# EAGLE board EBook READER v17 (EAGLE 9.7.0)
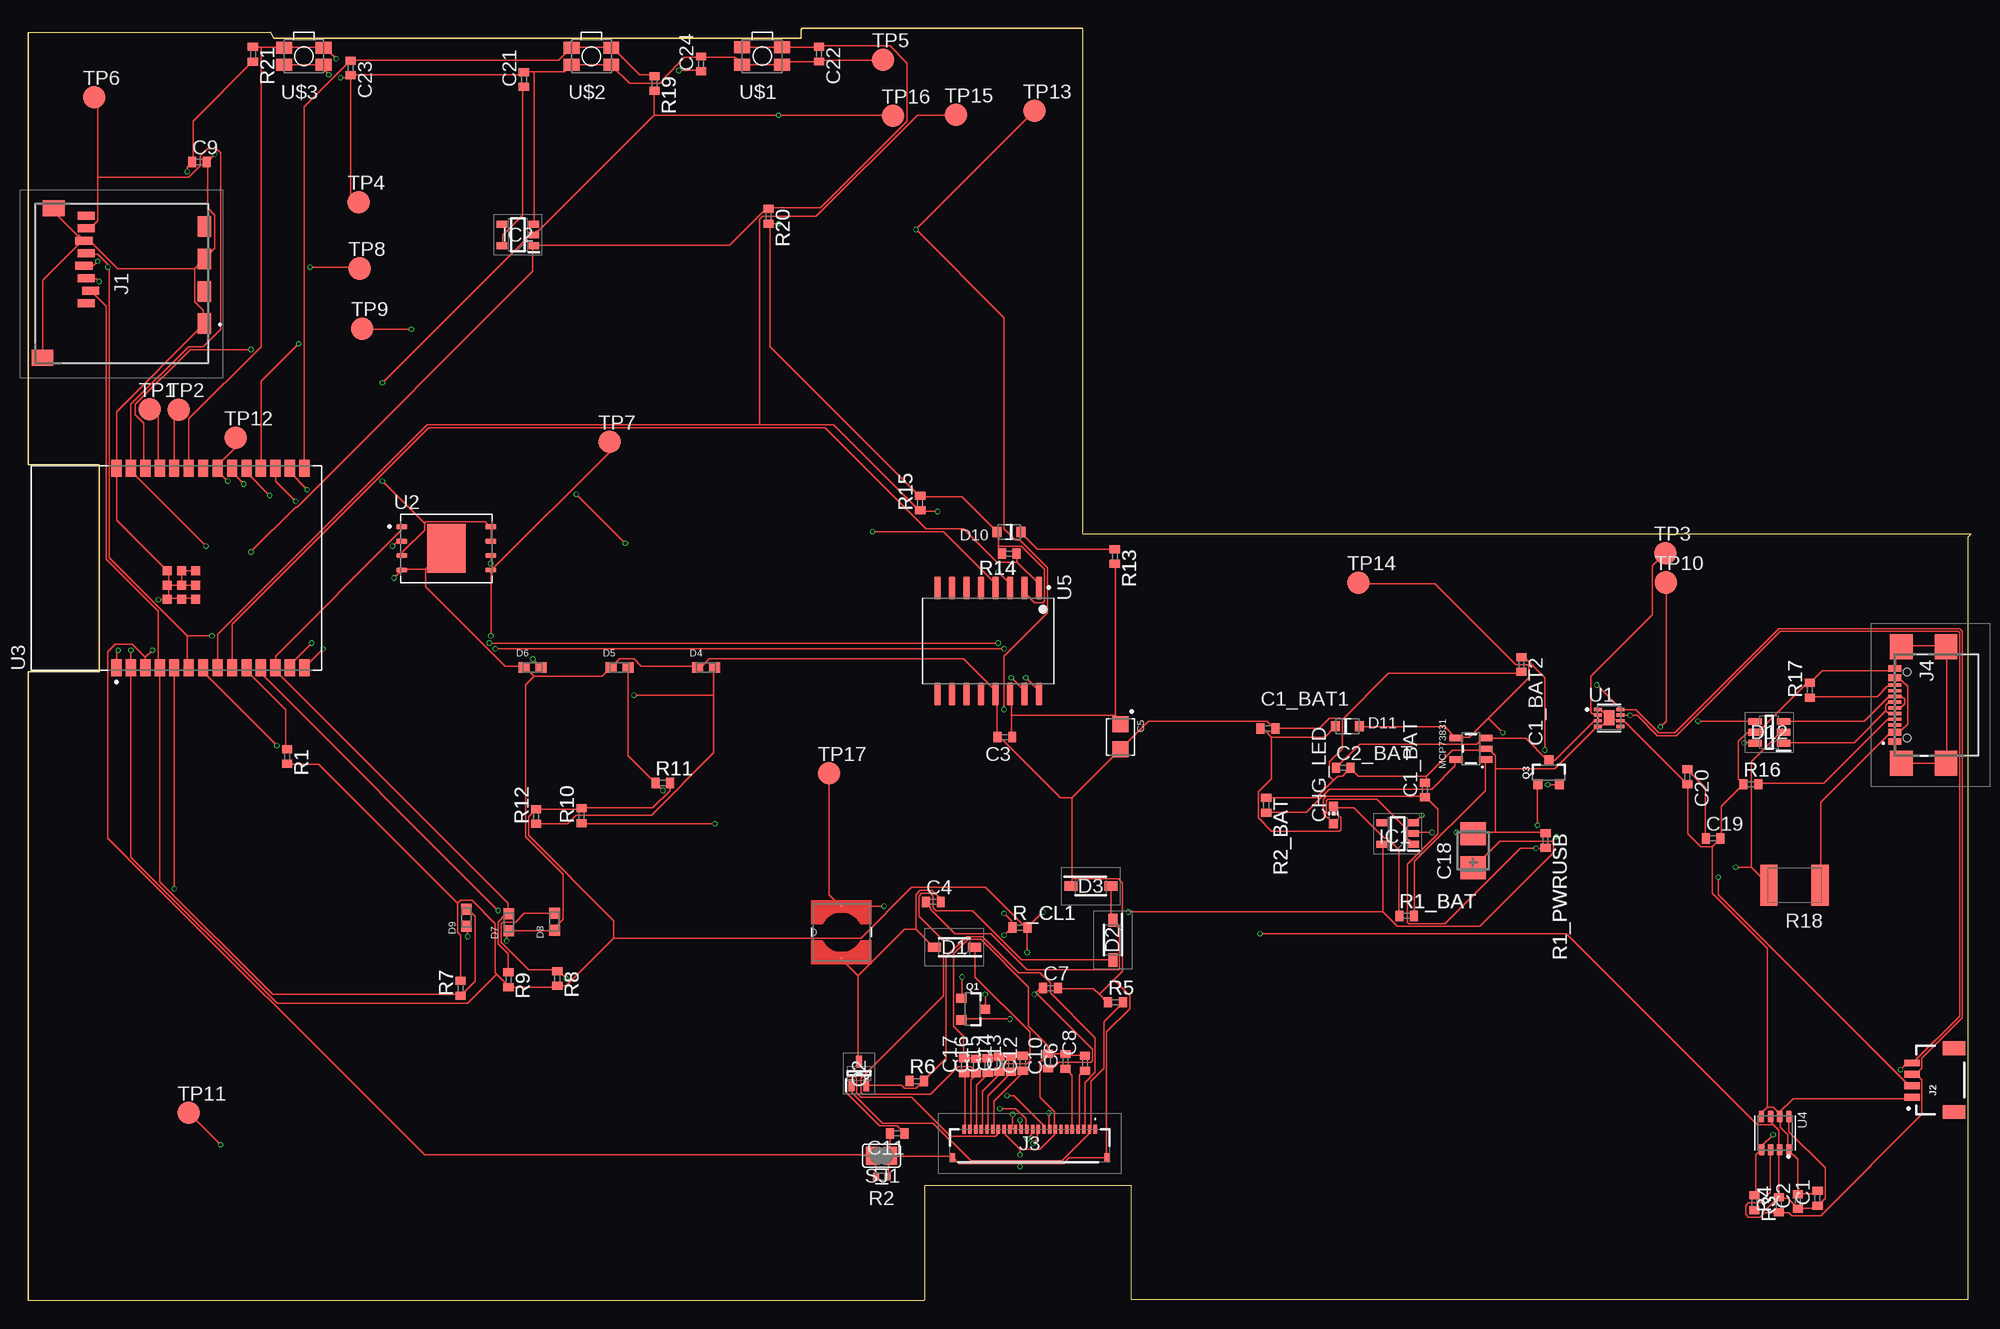
[diagram p0: board, top side]
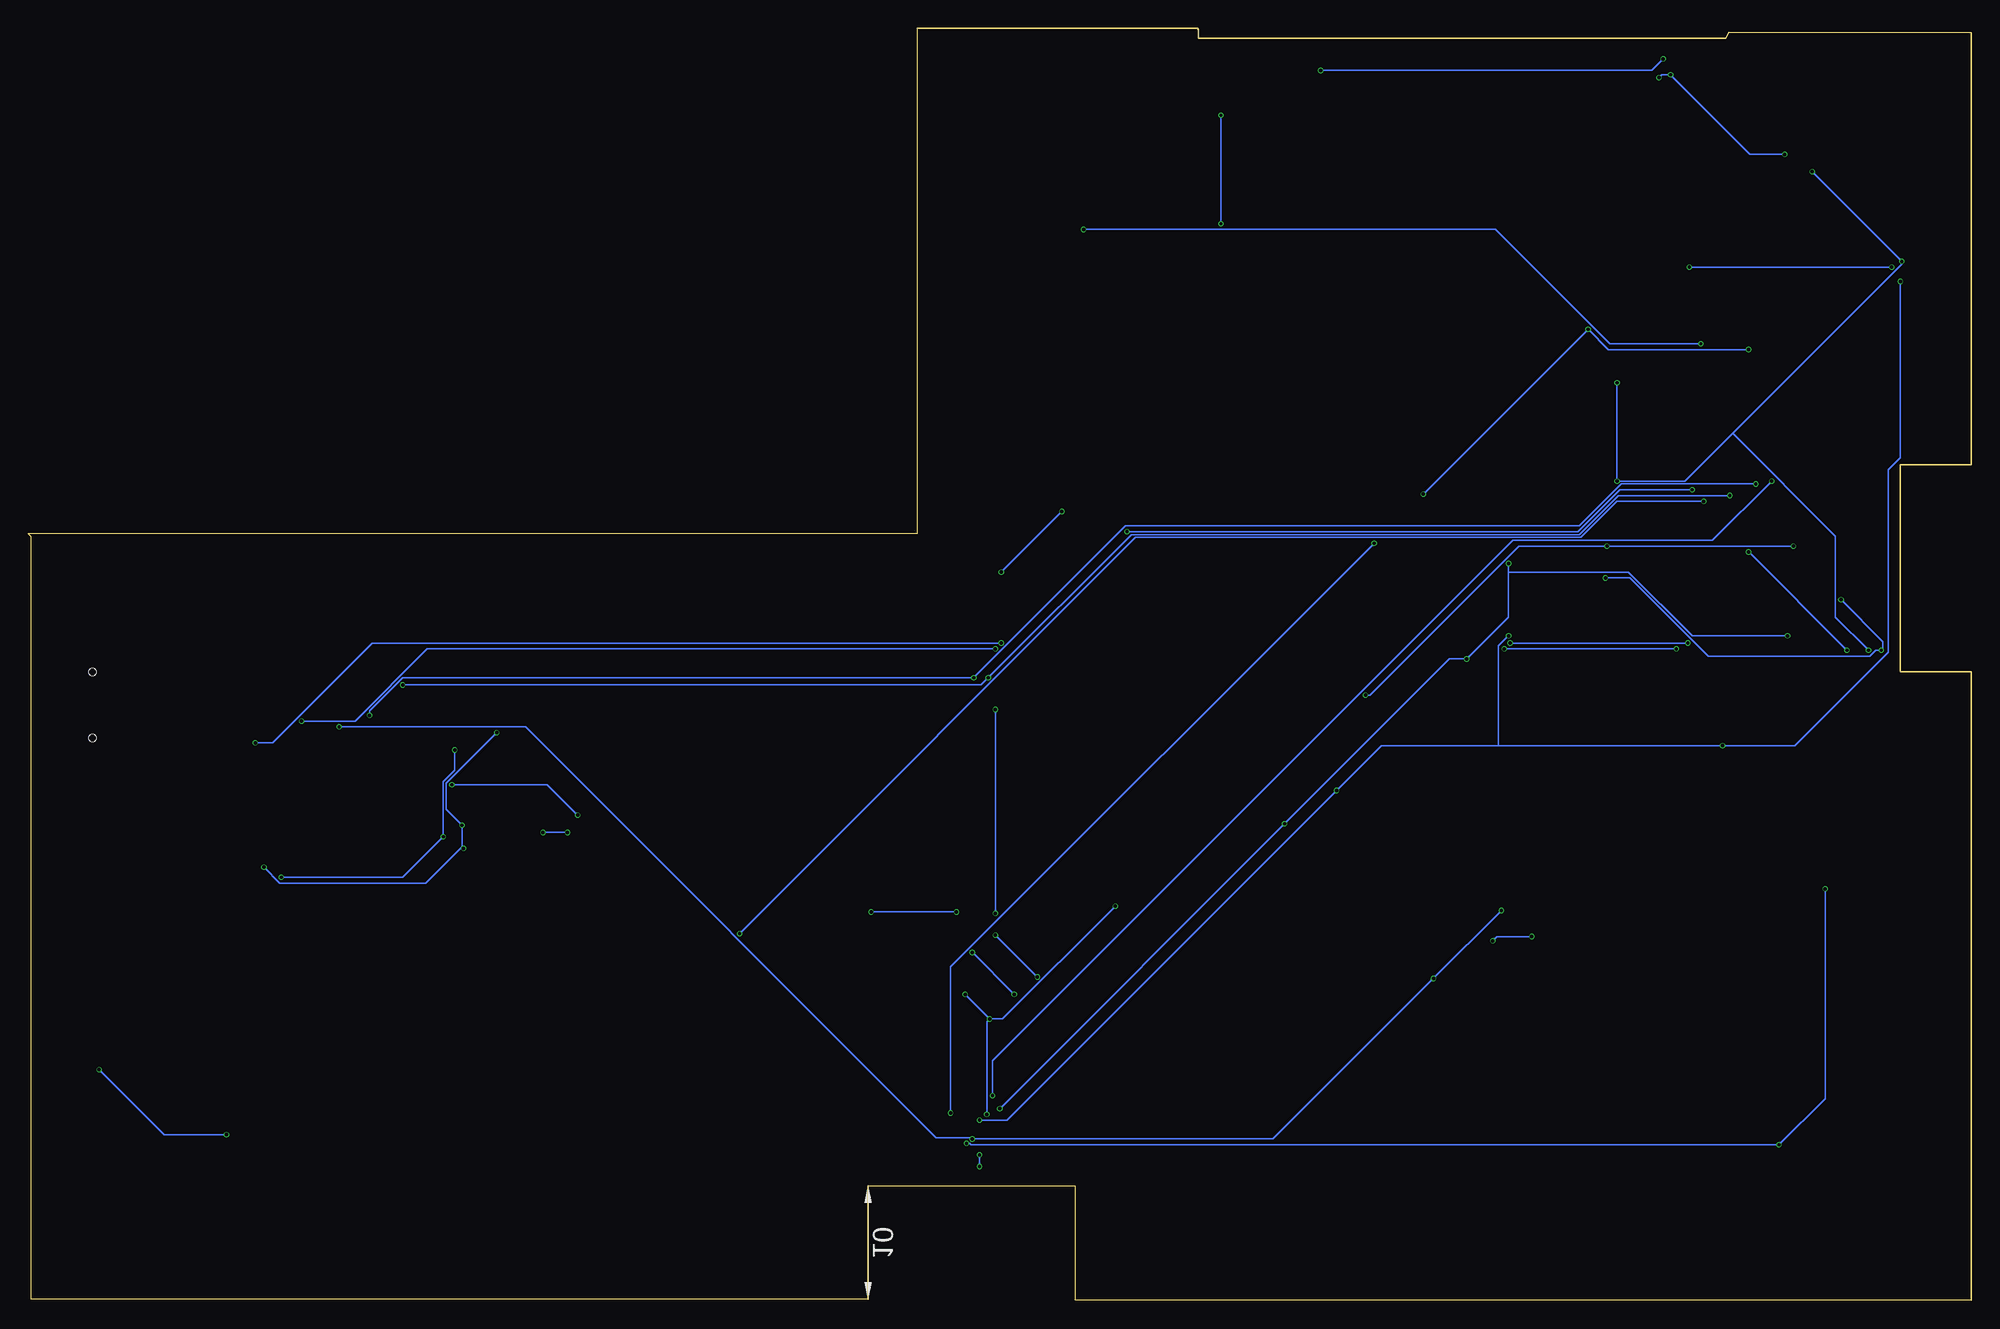
[diagram p1: board, bottom side, seen from below]

Size 170.67 x 111.69 mm. Coordinates in mm from the lower left corner, seen from the top.
Outline: 21.29,111.37 21.56,110.82 67.86,110.82 67.86,111.58 67.97,111.69 92.62,111.69 92.62,67.31 170.67,67.31 170.4,67.05 170.4,0.05 96.92,0.05 96.92,10.06 78.72,10.06 78.72,0.03 78.69,0 0,0 0,55.17 6.21,55.17 6.21,73.37 0,73.37 0,111.32 21.29,111.37
Copper layers (1*16): Top / Bottom
Stack-up Default Layer Stack: Top User Defined 0.035mm / Dielectric-1 User Defined 1.6mm / Bottom User Defined 0.035mm
Design rules: minimum copper width 5mil, minimum drill size 0.3mm, copper clearance wire_polygon to wire_polygon 5mil, copper clearance wire_polygon to pad_smd 5mil, copper clearance wire_polygon to via 5mil, copper clearance pad_smd to pad_smd 5mil, copper clearance pad_smd to via 5mil, copper clearance via to via 5mil, copper clearance smd to pad (same net) 5mil, copper clearance smd to via (same net) 5mil, copper clearance smd to smd (same net) 5mil, dimension clearance 0.2mm, via restrict clearance 0mil, restrict clearance 0mil, drill distance 6mil, keepout clearance 0mil

## Footprints (pad centres in the part's own frame; a part is rotated, then mirrored left to right if it is on the bottom)
ESP32_WROVER_EAGLE-LTSPICE_C0402 = smd 0.7 x 0.9: 1 -0.65,0; 2 0.65,0
EAGLE-LTSPICE_C0402 = smd 0.7 x 0.9: 1 -0.65,0; 2 0.65,0
CAPCP3225X100N = smd 1.4 x 1.4: 1 -1.1,0; 2 1.1,0
RCL_CT3528 = smd 2 x 2.2: + -1.5,0; - 1.5,0
ADAFRUIT_CHIP-LED0603 = smd 0.8 x 0.8: A 0,-0.75; C 0,0.75
SOD3716X135N = smd 1.15 x 0.8: 1 -1.75,0; 2 1.75,0
DIOC1608X36N = smd 0.97 x 0.94: 1 -0.75,0; 2 0.75,0
ESP32_WROVER_AVX---SD0805S020S1R0_AVX_SD0805S020S1R0_0 = smd 0.8 x 0.9: 1 -1.05,0; 2 1.05,0
SOT95P280X145-6N = smd 1.2 x 0.6: 1 -1.25,0.95; 2 -1.25,0; 3 -1.25,-0.95; 4 1.25,-0.95; 5 1.25,0; 6 1.25,0.95
SOT95P280X120-5N = smd 0.9 x 0.6: 1 -1.4,0.95; 2 -1.4,0; 3 -1.4,-0.95; 4 1.4,-0.95; 5 1.4,0.95
SOT95P280X125-5N = smd 0.9 x 0.6: 1 -1.4,0.95; 2 -1.4,0; 3 -1.4,-0.95; 4 1.4,-0.95; 5 1.4,0.95
112ATAARR03ATTEND = smd 1.8 x 1.2: G1 10.6,10.4; G2 4.9,10.4; S1 7.75,10.4; S2 2.05,10.4 | smd 1.4 x 1.9: G3 13.6,-3.85; G4 0.45,-2.85 | smd 0.7 x 1.5: P1 8.8,0; P2 7.7,0.4; P3 6.6,0; P4 5.5,-0.2; P5 4.4,0; P6 3.3,-0.2; P7 2.2,0; P8 1.1,0
JST04_1MM_RA = smd 0.6 x 1.35: 1 -1.5,0; 2 -0.5,0; 3 0.5,0; 4 1.5,0 | smd 1.2 x 2: NC1 2.8,-3.675; NC2 -2.8,-3.675
FH34SRJ24S05SH99 = smd 0.3 x 0.8: 1 5.75,1.45; 2 5.25,1.45; 3 4.75,1.45; 4 4.25,1.45; 5 3.75,1.45; 6 3.25,1.45; 7 2.75,1.45; 8 2.25,1.45; 9 1.75,1.45; 10 1.25,1.45; 11 0.75,1.45; 12 0.25,1.45; 13 -0.25,1.45; 14 -0.75,1.45; 15 -1.25,1.45; 16 -1.75,1.45; 17 -2.25,1.45; 18 -2.75,1.45; 19 -3.25,1.45; 20 -3.75,1.45; 21 -4.25,1.45; 22 -4.75,1.45; 23 -5.25,1.45; 24 -5.75,1.45 | smd 0.4 x 0.8: MP1 6.75,-1.05; MP2 -6.75,-1.05
SAMACSYS_PARTS_USB4110GFA = smd 0.3 x 1.15: A1 -3.35,3.678; A4 -2.55,3.678; A5 -1.25,3.678; A6 -0.25,3.678; A7 0.25,3.678; A8 1.25,3.678; A9 2.55,3.678; A12 3.35,3.678; B1 3.05,3.678; B4 2.25,3.678; B5 1.75,3.678; B6 0.75,3.678; B7 -0.75,3.678; B8 -1.75,3.678; B9 -2.25,3.678; B12 -3.05,3.678 | smd 2.18 x 2: MP1 -5.11,-0.827; MP2 5.11,-0.827; MP3 -5.11,3.103; MP4 5.11,3.103 | hole 0.65: -2.89,2.603; 2.89,2.603
IND_4828-WE-TPC_WRE = smd 0.127 x 0.127: 1 -2.286,0; 2 2.286,0
ESP32_WROVER_SPARKFUN-IC-POWER_SOT23-5 = smd 0.55 x 1.2: 1 -0.95,-1.3; 2 0,-1.3; 3 0.95,-1.3; 4 0.95,1.3; 5 -0.95,1.3
ESP32_WROVER_SPARKFUN-DISCRETESEMI_SOT23-3 = smd 0.8 x 0.9: 1 -0.95,-1; 2 0.95,-1; 3 0,1.1
SOT65P210X110-3N = smd 1.05 x 0.5: 1 -1.05,0.65; 2 -1.05,-0.65; 3 1.05,0
ESP32_WROVER_EAGLE-LTSPICE_R0402 = smd 0.7 x 0.9: 1 -0.65,0; 2 0.65,0
RESC1005X40 = smd 0.535 x 0.644: 1 -0.507,0; 2 0.507,0
ESP32C6_VARISTOR_CT/CN1812 = smd 1.5 x 3.6: 1 -2.25,0; 2 2.25,0
SJ = smd 1.168 x 1.6: 1 -0.762,0; 2 0.762,0
TP20R = smd 2 x 2: TP 0,0
SON50P200X200X80-9N = smd 0.76 x 0.27: 1 -0.985,0.75; 2 -0.985,0.25; 3 -0.985,-0.25; 4 -0.985,-0.75; 5 0.985,-0.75; 6 0.985,-0.25; 7 0.985,0.25; 8 0.985,0.75 | smd 0.9 x 1.3: 9 0,0
SON127P600X800X80-9N = smd 0.94 x 0.44: 1 -3.895,1.905; 2 -3.895,0.635; 3 -3.895,-0.635; 4 -3.895,-1.905; 5 3.895,-1.905; 6 3.895,-0.635; 7 3.895,0.635; 8 3.895,1.905 | smd 3.4 x 4.3: 9 0,0
XCVR_ESP32-C6-WROOM-1-N8 = smd 1.5 x 0.9: 1 -8.75,5.26; 2 -8.75,3.99; 3 -8.75,2.72; 4 -8.75,1.45; 5 -8.75,0.18; 6 -8.75,-1.09; 7 -8.75,-2.36; 8 -8.75,-3.63; 9 -8.75,-4.9; 10 -8.75,-6.17; 11 -8.75,-7.44; 12 -8.75,-8.71; 13 -8.75,-9.98; 14 -8.75,-11.25; 15 8.75,-11.25; 16 8.75,-9.98; 17 8.75,-8.71; 18 8.75,-7.44; 19 8.75,-6.17; 20 8.75,-4.9; 21 8.75,-3.63; 22 8.75,-2.36; 23 8.75,-1.09; 24 8.75,0.18; 25 8.75,1.45; 26 8.75,2.72; 27 8.75,3.99; 28 8.75,5.26 | smd 0.8 x 0.8: 29_1 -2.755,0.79; 29_2 -1.505,0.79; 29_3 -0.255,0.79; 29_4 -2.755,-0.46; 29_5 -1.505,-0.46; 29_6 -0.255,-0.46; 29_7 -2.755,-1.71; 29_8 -1.505,-1.71; 29_9 -0.255,-1.71
ESP32_WROVER_BME680_PSON80P300X300X100-8N = smd 1.016 x 0.5: 1 1.458,1.2; 2 1.458,0.4; 3 1.458,-0.4; 4 1.458,-1.2; 5 -1.458,-1.22; 6 -1.458,-0.4; 7 -1.458,0.4; 8 -1.458,1.2
SOIC127P1032X265-16N = smd 2.05 x 0.59: 1 -4.655,4.445; 2 -4.655,3.175; 3 -4.655,1.905; 4 -4.655,0.635; 5 -4.655,-0.635; 6 -4.655,-1.905; 7 -4.655,-3.175; 8 -4.655,-4.445; 9 4.655,-4.445; 10 4.655,-3.175; 11 4.655,-1.905; 12 4.655,-0.635; 13 4.655,0.635; 14 4.655,1.905; 15 4.655,3.175; 16 4.655,4.445
MYBUTTON = smd 1.4 x 1.05: 1 1.75,0.75; 2 -1.75,0.75; 3 -1.75,-0.75; 4 1.75,-0.75

## Placement (x,y rotation side)
C1  [ESP32_WROVER_EAGLE-LTSPICE_C0402]  157.18,8.95 90 top
C1_BAT  4.7uF  [ESP32_WROVER_EAGLE-LTSPICE_C0402]  122.69,44.8 90 top
C1_BAT1  4.7uF  [ESP32_WROVER_EAGLE-LTSPICE_C0402]  108.89,50.2 0 top
C1_BAT2  4.7uF  [ESP32_WROVER_EAGLE-LTSPICE_C0402]  131.16,55.82 270 top
C2  [ESP32_WROVER_EAGLE-LTSPICE_C0402]  155.45,8.66 90 top
C2_BAT  4.7uF  [ESP32_WROVER_EAGLE-LTSPICE_C0402]  115.51,46.76 0 top
C3  [EAGLE-LTSPICE_C0402]  85.78,49.45 180 top
C4  4.7uF/25V  [EAGLE-LTSPICE_C0402]  79.5,34.97 0 top
C5  CPH3225A  [CAPCP3225X100N]  95.94,49.46 270 top
C6  1uF/50V  [ESP32_WROVER_EAGLE-LTSPICE_C0402]  91.1,20.96 90 top
C7  10uF  [EAGLE-LTSPICE_C0402]  89.79,27.4 0 top
C8  1uF/50V  [ESP32_WROVER_EAGLE-LTSPICE_C0402]  92.81,20.81 90 top
C9  100nF  [EAGLE-LTSPICE_C0402]  15.02,99.96 0 top
C10  0.1uF/50V  [ESP32_WROVER_EAGLE-LTSPICE_C0402]  89.57,20.99 90 top
C11  1uF/50V  [ESP32_WROVER_EAGLE-LTSPICE_C0402]  76.33,14.64 180 top
C12  1uF/50V  [ESP32_WROVER_EAGLE-LTSPICE_C0402]  87.35,20.81 90 top
C13  1uF/50V  [ESP32_WROVER_EAGLE-LTSPICE_C0402]  86.32,20.7 90 top
C14  1uF/50V  [ESP32_WROVER_EAGLE-LTSPICE_C0402]  85.3,20.72 90 top
C15  1uF/50V  [ESP32_WROVER_EAGLE-LTSPICE_C0402]  84.27,20.61 90 top
C16  1uF/50V  [ESP32_WROVER_EAGLE-LTSPICE_C0402]  83.24,20.56 90 top
C17  1uF/50V  [ESP32_WROVER_EAGLE-LTSPICE_C0402]  82.22,20.58 90 top
C18  100uF  [RCL_CT3528]  126.92,39.46 90 top
C19  100nF  [ESP32_WROVER_EAGLE-LTSPICE_C0402]  148.01,40.55 0 top
C20  4.7uF  [ESP32_WROVER_EAGLE-LTSPICE_C0402]  145.75,45.96 270 top
C21  100nF  [ESP32_WROVER_EAGLE-LTSPICE_C0402]  43.53,107.2 90 top
C22  1uF  [ESP32_WROVER_EAGLE-LTSPICE_C0402]  69.45,109.44 270 top
C23  100nF  [ESP32_WROVER_EAGLE-LTSPICE_C0402]  28.3,108.22 270 top
C24  100nF  [ESP32_WROVER_EAGLE-LTSPICE_C0402]  59.08,108.58 90 top
CHG_LED  [ADAFRUIT_CHIP-LED0603]  114.66,42.6 0 top
D1  MBR0530  [SOD3716X135N]  81.35,30.99 180 top
D2  MBR0530  [SOD3716X135N]  95.27,31.62 270 top
D3  MBR0530  [SOD3716X135N]  93.34,36.36 0 top
D4  PGB1010603MR  [DIOC1608X36N]  59.54,55.57 0 top
D5  PGB1010603MR  [DIOC1608X36N]  51.92,55.57 0 top
D6  PGB1010603MR  [DIOC1608X36N]  44.3,55.57 0 top
D7  PGB1010603MR  [DIOC1608X36N]  42.2,33.17 90 top
D8  PGB1010603MR  [DIOC1608X36N]  46.22,33.22 90 top
D9  PGB1010603MR  [DIOC1608X36N]  38.48,33.6 90 top
D10  ESP32_WROVER_AVX---SD0805S020S1R0_AVX_SD0805S020S1R0_0_0AVX_SD0805S020S1R0_0_0  [ESP32_WROVER_AVX---SD0805S020S1R0_AVX_SD0805S020S1R0_0]  86.16,67.47 180 top
D11  ESP32_WROVER_AVX---SD0805S020S1R0_AVX_SD0805S020S1R0_0_0AVX_SD0805S020S1R0_0_0  [ESP32_WROVER_AVX---SD0805S020S1R0_AVX_SD0805S020S1R0_0]  115.88,50.41 0 top
D12  USBLC6-2SC6Y  [SOT95P280X145-6N]  152.94,49.87 180 top
IC1  XC6220A331MR-G  [SOT95P280X120-5N]  120.29,40.97 180 top
IC2  BD5229G-TR  [SOT95P280X125-5N]  42.99,93.55 180 top
J1  112A-TAAR-R03_ATTEND  [112ATAARR03ATTEND]  5.08,96.35 270 top
J2  QWIIC_RIGHT_ANGLE  [JST04_1MM_RA]  165.49,19.32 90 top
J3  FH34SRJ-24S-0.5SH_99_  [FH34SRJ24S05SH99]  87.97,13.55 0 top
J4  SAMACSYS_PARTS_USB4110-GF-A  [SAMACSYS_PARTS_USB4110GFA]  167.64,52.27 90 top
L1  68uH  [IND_4828-WE-TPC_WRE]  71.42,32.31 90 top
MCP73831  ESP32_WROVER_SPARKFUN-IC-POWER_MCP73831  [ESP32_WROVER_SPARKFUN-IC-POWER_SOT23-5]  126.73,48.42 90 top
Q1  20V/4.2A/52mΩ/1.4W  [ESP32_WROVER_SPARKFUN-DISCRETESEMI_SOT23-3]  82.94,25.55 270 top
Q2  SI1308EDL-T1-GE3  [SOT65P210X110-3N]  72.97,19.9 90 top
Q3  20V/4.2A/52mΩ/1.4W  [ESP32_WROVER_SPARKFUN-DISCRETESEMI_SOT23-3]  133.56,46.32 0 top
R1  [ESP32_WROVER_EAGLE-LTSPICE_R0402]  22.72,47.74 270 top
R1_BAT  200  [ESP32_WROVER_EAGLE-LTSPICE_R0402]  121.08,33.74 0 top
R1_PWRUSB  100K  [ESP32_WROVER_EAGLE-LTSPICE_R0402]  133.28,40.37 270 top
R2  2.2  [RESC1005X40]  74.95,10.84 180 top
R2_BAT  2K  [ESP32_WROVER_EAGLE-LTSPICE_R0402]  108.74,43.47 270 top
R3  [ESP32_WROVER_EAGLE-LTSPICE_R0402]  151.63,8.54 270 top
R4  [ESP32_WROVER_EAGLE-LTSPICE_R0402]  153.77,8.37 90 top
R5  10K  [ESP32_WROVER_EAGLE-LTSPICE_R0402]  95.5,26.15 0 top
R6  0.47  [ESP32_WROVER_EAGLE-LTSPICE_R0402]  78.05,19.24 0 top
R7  10K  [ESP32_WROVER_EAGLE-LTSPICE_R0402]  37.98,27.38 90 top
R8  10K  [ESP32_WROVER_EAGLE-LTSPICE_R0402]  46.47,28.24 270 top
R9  10K  [ESP32_WROVER_EAGLE-LTSPICE_R0402]  42.17,28.14 270 top
R10  10K  [ESP32_WROVER_EAGLE-LTSPICE_R0402]  48.6,42.53 90 top
R11  10K  [ESP32_WROVER_EAGLE-LTSPICE_R0402]  55.73,45.41 0 top
R12  10K  [ESP32_WROVER_EAGLE-LTSPICE_R0402]  44.61,42.48 90 top
R13  [ESP32_WROVER_EAGLE-LTSPICE_R0402]  95.44,65.31 270 top
R14  [ESP32_WROVER_EAGLE-LTSPICE_R0402]  86.16,65.56 180 top
R15  [ESP32_WROVER_EAGLE-LTSPICE_R0402]  78.34,70 90 top
R16  5k1  [ESP32_WROVER_EAGLE-LTSPICE_R0402]  151.31,45.3 0 top
R17  5k1  [ESP32_WROVER_EAGLE-LTSPICE_R0402]  156.5,53.57 90 top
R18  ESP32C6_VARISTORCN1812  [ESP32C6_VARISTOR_CT/CN1812]  155.15,36.44 180 top
R19  10K  [ESP32_WROVER_EAGLE-LTSPICE_R0402]  55,106.86 270 top
R20  10K  [ESP32_WROVER_EAGLE-LTSPICE_R0402]  65.01,95.19 270 top
R21  10K  [ESP32_WROVER_EAGLE-LTSPICE_R0402]  19.73,109.43 270 top
R_CL1  10K  [ESP32_WROVER_EAGLE-LTSPICE_R0402]  87.1,32.71 0 top
SJ1  [SJ]  74.94,12.69 180 top
TP1  TPTP20R  [TP20R]  10.66,78.23 0 top
TP2  TPTP20R  [TP20R]  13.18,78.22 0 top
TP3  TPTP20R  [TP20R]  143.79,65.61 0 top
TP4  TPTP20R  [TP20R]  29.03,96.43 0 top
TP5  TPTP20R  [TP20R]  75.1,108.94 0 top
TP6  TPTP20R  [TP20R]  5.77,105.64 0 top
TP7  TPTP20R  [TP20R]  51.05,75.37 0 top
TP8  TPTP20R  [TP20R]  29.08,90.61 0 top
TP9  TPTP20R  [TP20R]  29.33,85.33 0 top
TP10  TPTP20R  [TP20R]  143.86,63.03 0 top
TP11  TPTP20R  [TP20R]  14.08,16.43 0 top
TP12  TPTP20R  [TP20R]  18.19,75.74 0 top
TP13  TPTP20R  [TP20R]  88.36,104.44 0 top
TP14  TPTP20R  [TP20R]  116.84,63.02 0 top
TP15  TPTP20R  [TP20R]  81.47,104.09 0 top
TP16  TPTP20R  [TP20R]  75.94,104 0 top
TP17  TPTP20R  [TP20R]  70.33,46.26 0 top
U1  MAX17048G+T10  [SON50P200X200X80-9N]  138.87,51.13 0 top
U2  W25Q512JVEIQ  [SON127P600X800X80-9N]  36.72,66.02 0 top
U3  ESP32-C6-WROOM-1-N8  [XCVR_ESP32-C6-WROOM-1-N8]  12.99,64.3 90 top
U4  ESP32_WROVER_BME680_BME680  [ESP32_WROVER_BME680_PSON80P300X300X100-8N]  153.45,14.67 270 top
U5  DS3231SN#  [SOIC127P1032X265-16N]  84.33,57.88 270 top
U$1  BUTTON_CUSYOMV1  [MYBUTTON]  64.46,109.27 180 top
U$2  BUTTON_CUSYOMV1  [MYBUTTON]  49.46,109.26 180 top
U$3  BUTTON_CUSYOMV1  [MYBUTTON]  24.2,109.26 180 top

## Library data of the parts
C1 C1_BAT C1_BAT1 C1_BAT2 C2 C2_BAT C3 C4 C6-C17 C19-C24 = DeskAssistant v19 v1; SPICEMODEL: NONE; SPICEPREFIX: C
C5 = DeskAssistant v19 v1; AVAILABILITY: Not in stock; CHECK_PRICES: https://www.snapeda.com/parts/CPH3225A/Seiko+Instruments/view-part/?ref=eda; DESCRIPTION: 11 mF (EDLC) Supercapacitor 3.3 V 1210 (3225 Metric) - -; MF: Seiko Instruments; MP: CPH3225A; PACKAGE: 1210 Seiko; PRICE: None; PURCHASE-URL: https://www.snapeda.com/api/url_track_click_mouser/?unipart_id=562593&manufacturer=Seiko Instruments&part_name=CPH3225A&search_term=None; SNAPEDA_LINK: https://www.snapeda.com/parts/CPH3225A/Seiko+Instruments/view-part/?ref=snap
C18 = DeskAssistant v19 v1; SPICEPREFIX: C
CHG_LED R18 TP1-TP17 U$1-U$3 = DeskAssistant v19 v1
D1-D3 = DeskAssistant v19 v1; AVAILABILITY: In Stock; CHECK_PRICES: https://www.snapeda.com/parts/MBR0530/Onsemi/view-part/?ref=eda; DESCRIPTION: Diode Schottky 30 V 500mA Surface Mount SOD-123; MF: ON Semiconductor; MP: MBR0530; PACKAGE: SOD-123-2 ON Semiconductor; PRICE: None; PURCHASE-URL: https://www.snapeda.com/api/url_track_click_mouser/?unipart_id=179458&manufacturer=ON Semiconductor&part_name=MBR0530&search_term=None; SNAPEDA_LINK: https://www.snapeda.com/parts/MBR0530/Onsemi/view-part/?ref=snap
D4-D9 = DeskAssistant v19 v1; AVAILABILITY: In Stock; CHECK_PRICES: https://www.snapeda.com/parts/PGB1010603MR/Littelfuse/view-part/?ref=eda; DESCRIPTION: 150V (Typ) Clamp - Ipp Tvs Diode Surface Mount 0603 (1608 Metric); MF: Littelfuse Inc.; MP: PGB1010603MR; PACKAGE: 0603 Littelfuse Inc.; PRICE: None; PURCHASE-URL: https://www.snapeda.com/api/url_track_click_mouser/?unipart_id=5659453&manufacturer=Littelfuse Inc.&part_name=PGB1010603MR&search_term=None; SNAPEDA_LINK: https://www.snapeda.com/parts/PGB1010603MR/Littelfuse/view-part/?ref=snap
D10 D11 = DeskAssistant v19 v1; CENTROID_NOT_SPECIFIED: No; DATASHEET: http://datasheets.avx.com/schottky.pdf; DIGIKEY_DESCRIPTION: DIODE SCHOTTKY 20V 1A 0805; DIGIKEY_PART_NUMBER: 478-7800-1-ND; LEAD_FREE: yes; MF: AVX; MOUSER_PART_NUMBER: 581-SD0805S020S1R0; PACKAGE: 0805 (2012 metric); PREFIX: D; ROHS: yes; TEMPERATURE_RANGE_HIGH: +125°C; TEMPERATURE_RANGE_LOW: -55°C
D12 = DeskAssistant v19 v1; AVAILABILITY: In Stock; CHECK_PRICES: https://www.snapeda.com/parts/USBLC6-2SC6Y/STMicroelectronics/view-part/?ref=eda; DESCRIPTION: 17V Clamp 5A (8/20µs) Ipp Tvs Diode Surface Mount SOT-23-6; MF: STMicroelectronics; MP: USBLC6-2SC6Y; PACKAGE: SOT-23-6 STMicroelectronics; PRICE: None; SNAPEDA_LINK: https://www.snapeda.com/parts/USBLC6-2SC6Y/STMicroelectronics/view-part/?ref=snap
IC1 = DeskAssistant v19 v1; DESCRIPTION: LDO Voltage Regulators; HEIGHT: 1.2mm; MANUFACTURER_NAME: Torex; MANUFACTURER_PART_NUMBER: XC6220A331MR-G; MOUSER_PART_NUMBER: 865-XC6220A331MR-G; MOUSER_PRICE-STOCK: https://www.mouser.co.uk/ProductDetail/Torex-Semiconductor/XC6220A331MR-G?qs=AsjdqWjXhJ8ZSWznL1J0gg%3D%3D
IC2 = DeskAssistant v19 v1; DESCRIPTION: Voltage Detector with Adjustable Delay Time: CMOS processes are utilized to develop high precision, low current consumption CMOS reset ICs that allow arbitrary setting of the delay time. The extensive lineup includes both Nch Open Drain and CMOS output types in a wide range of detection voltages (from 2.3V to 6.0V, in 0.1V steps), enabling selection of the ideal solution based on customer requirements. In addition, the entire series is of course both lead-free and RoHS-compliant.; HEIGHT: 1.25mm; MANUFACTURER_NAME: ROHM Semiconductor; MANUFACTURER_PART_NUMBER: BD5229G-TR; MOUSER_PART_NUMBER: 755-BD5229G-TR; MOUSER_PRICE-STOCK: https://www.mouser.co.uk/ProductDetail/ROHM-Semiconductor/BD5229G-TR?qs=4kLU8WoGk0vvnhrrYwdszw%3D%3D
J1 = DeskAssistant v19 v1; DESCRIPTION: Micro SD Card Socket, Push-Push Type, Top Mount, SMT, H=1.83mm, 10u; HEIGHT: 1.9mm; MANUFACTURER_NAME: ATTEND; MANUFACTURER_PART_NUMBER: 112A-TAAR-R03 ATTEND
J2 = DeskAssistant v19 v1; PROD_ID: CONN-13694
J3 = DeskAssistant v19 v1; DESCRIPTION: 24 Position FFC, FPC Connector Contacts, Top and Bottom 0.020" (0.50mm) Surface Mount, Right Angle; HEIGHT: 1.1mm; MANUFACTURER_NAME: Hirose; MANUFACTURER_PART_NUMBER: FH34SRJ-24S-0.5SH(99); MOUSER_PART_NUMBER: 798-FH34SRJ24S05SH99; MOUSER_PRICE-STOCK: https://www.mouser.co.uk/ProductDetail/Hirose-Connector/FH34SRJ-24S-0.5SH99?qs=vcbW%252B4%252BSTIpKBl5ap9J8Fw%3D%3D
J4 = DeskAssistant v19 v1; DESCRIPTION: CONN USB 2.0 TYPE-C R/A SMT; HEIGHT: 3.26mm; MANUFACTURER_NAME: GCT (GLOBAL CONNECTOR TECHNOLOGY); MANUFACTURER_PART_NUMBER: USB4110-GF-A; MOUSER_PART_NUMBER: 640-USB4110-GF-A; MOUSER_PRICE-STOCK: https://www.mouser.co.uk/ProductDetail/GCT/USB4110-GF-A?qs=KUoIvG%2F9IlYiZvIXQjyJeA%3D%3D
L1 = DeskAssistant v19 v1; COPYRIGHT: Copyright (C) 2024 Ultra Librarian. All rights reserved.; MANUFACTURER_PART_NUMBER: 744043680; MFR_NAME: Wurth Electronics
MCP73831 = DeskAssistant v19 v1; PROD_ID: IC-09995
Q1 Q3 = DeskAssistant v19 v1; PROD_ID: TRAN-14388
Q2 = DeskAssistant v19 v1; AVAILABILITY: In Stock; CHECK_PRICES: https://www.snapeda.com/parts/SI1308EDL-T1-GE3/Vishay+Siliconix/view-part/?ref=eda; DESCRIPTION: Si1308EDL-T1-GE3 N-channel MOSFET Transistor, 1.5 A, 30 V, 3-Pin SC-70 | Siliconix / Vishay SI1308EDL-T1-GE3; MF: Vishay Siliconix; MP: SI1308EDL-T1-GE3; PACKAGE: SOT-323 Vishay Semiconductor; PRICE: None; PURCHASE-URL: https://www.snapeda.com/api/url_track_click_mouser/?unipart_id=274603&manufacturer=Vishay Siliconix&part_name=SI1308EDL-T1-GE3&search_term=None; SNAPEDA_LINK: https://www.snapeda.com/parts/SI1308EDL-T1-GE3/Vishay+Siliconix/view-part/?ref=snap
R1 R1_BAT R1_PWRUSB R2_BAT R3-R17 R19-R21 R_CL1 = DeskAssistant v19 v1; SPICEMODEL: NONE; SPICEPREFIX: R
R2 = Resistor; CATEGORY: Resistors; DESCRIPTION: Chip Resistor 1.05 X 0.54 X 0.40 mm body 0402(1005-METRIC) Package; PACKAGE_SIZE: 0402; PACKAGE_TYPE: SMD
SJ1 = jumper
U1 = DeskAssistant v19 v1; AVAILABILITY: In Stock; CHECK_PRICES: https://www.snapeda.com/parts/MAX17048G+T10/Analog+Devices/view-part/?ref=eda; DESCRIPTION: 3µA 1-Cell/2-Cell Fuel Gauge with ModelGauge; MF: Analog Devices; MP: MAX17048G+T10; PACKAGE: TDFN-8 Maxim; PRICE: None; PURCHASE-URL: https://www.snapeda.com/api/url_track_click_mouser/?unipart_id=329239&manufacturer=Analog Devices&part_name=MAX17048G+T10&search_term=None; SNAPEDA_LINK: https://www.snapeda.com/parts/MAX17048G+T10/Analog+Devices/view-part/?ref=snap
U2 = DeskAssistant v19 v1; AVAILABILITY: In Stock; CHECK_PRICES: https://www.snapeda.com/parts/W25Q512JVEIQ/Winbond+Electronics/view-part/?ref=eda; DESCRIPTION: FLASH - NOR Memory IC 512Mb (64M x 8) SPI - Quad I/O 133 MHz 8-WSON (8x6); MF: Winbond Electronics; MP: W25Q512JVEIQ; PACKAGE: Package; PRICE: None; SNAPEDA_LINK: https://www.snapeda.com/parts/W25Q512JVEIQ/Winbond+Electronics/view-part/?ref=snap
U3 = DeskAssistant v19 v1; AVAILABILITY: In Stock; CHECK_PRICES: https://www.snapeda.com/parts/ESP32-C6-WROOM-1-N8/Espressif+Systems/view-part/?ref=eda; DESCRIPTION: Multiprotocol Modules ESP32-C6 module, Wi-Fi 6 in 2.4 GHz band, Bluetooth 5, Zigbee 3.0 and Thread. ESP34-WROOM Compatible - ENGINEERING SAMPLE; MF: Espressif Systems; MP: ESP32-C6-WROOM-1-N8; PACKAGE: None; PRICE: None; SNAPEDA_LINK: https://www.snapeda.com/parts/ESP32-C6-WROOM-1-N8/Espressif+Systems/view-part/?ref=snap
U4 = DeskAssistant v19 v1; AVAILABILITY: Unavailable; DESCRIPTION: Integrated Environmental Unit; MF: Bosch Sensortec; MP: BME680; PACKAGE: LGA-8 Bosch Tools; PRICE: None
U5 = DeskAssistant v19 v1; AVAILABILITY: In Stock; CHECK_PRICES: https://www.snapeda.com/parts/DS3231SN%23/Analog+Devices/view-part/?ref=eda; DESCRIPTION: Extremely Accurate I²C-Integrated RTC/TCXO/Crystal; MF: Analog Devices; MP: DS3231SN#; PACKAGE: SOIC-16 Maxim; PRICE: None; PURCHASE-URL: https://www.snapeda.com/api/url_track_click_mouser/?unipart_id=99048&manufacturer=Analog Devices&part_name=DS3231SN#&search_term=None; SNAPEDA_LINK: https://www.snapeda.com/parts/DS3231SN%23/Analog+Devices/view-part/?ref=snap

## Nets
3V3: C1_BAT2.1 C9.1 C18.+ D10.2 IC1.5 IC2.2 J1.P4 J2.2 Q1.3 R1.2 R7.2 R8.2 R9.2 R10.2 R11.2 R12.2 R14.2 R15.2 R19.2 R20.2 R21.2 R_CL1.2 TP16.TP U2.3 U2.7 U2.8 U3.2 U5.2
12C_PW: C1.1 C2.1 R3.2 R4.2 U3.17 U4.2 U4.6 U4.8
32KHZ: R14.1 U3.9 U5.1
DN: D12.1 J4.A7 J4.B7
DP: D12.3 J4.A6 J4.B6
EPD_3V3: C7.1 C10.1 J3.15 J3.16 L1.2 Q1.2 TP17.TP
EPD_3V3_C: Q1.1 R_CL1.1 TP13.TP U3.18
EPD_BUSY: J3.9 TP9.TP U3.26
EPD_CS: D8.2 J3.12 R8.1 TP10.TP U3.11
EPD_DC: J3.11 TP11.TP U3.5
EPD_RST: J3.10 TP12.TP U3.21
FLASH_CS: D7.2 R9.1 U2.1 U3.12
GDR: J3.2 Q2.1 R5.2
GND: C1.2 C1_BAT1.2 C1_BAT2.2 C1_BAT.2 C2.2 C2_BAT.2 C3.2 C5.2 C6.2 C7.2 C8.2 C9.2 C10.2 C11.2 C12.2 C13.2 C14.2 C15.2 C16.2 C17.2 C18.- C19.2 C20.2 C21.2 C22.2 C23.2 C24.2 D3.1 D4.1 D5.1 D6.1 D7.1 D8.1 D9.1 D12.5 IC1.2 IC2.3 J1.G1 J1.G2 J1.G3 J1.G4 J1.P6 J2.1 J3.8 J3.17 J3.MP1 J3.MP2 J4.A1 J4.A12 J4.B1 J4.B12 J4.MP1 J4.MP2 J4.MP3 J4.MP4 MCP73831.2 R1_PWRUSB.1 R2.1 R2_BAT.1 R5.1 R16.1 R17.2 SJ1.1 TP4.TP TP5.TP U1.1 U1.4 U1.6 U1.9 U2.4 U2.9 U3.1 U3.28 U3.29_1 U3.29_2 U3.29_3 U3.29_4 U3.29_5 U3.29_6 U3.29_7 U3.29_8 U3.29_9 U4.1 U4.5 U4.7 U5.13 U$1.1 U$1.2 U$2.1 U$2.2 U$3.1 U$3.2
GPIO8: R1.1 U3.10
INT_RTC: R15.1 TP15.TP U3.8 U5.3
IO/BOOT: C23.1 R19.1 U3.15 U$2.3 U$2.4
IO/CHANGE: C24.1 R21.1 U3.23 U$3.3 U$3.4
MISO: D4.2 J1.P7 R12.1 TP6.TP U2.2 U3.27
MOSI: D5.2 J1.P3 J3.14 R11.1 TP7.TP U2.5 U3.7
N$1: C4.1 D2.1 D3.2
N$2: MCP73831.1 R1_BAT.2
N$3: CHG_LED.C R1_BAT.1
N$4: C1_BAT1.1 D11.1 IC1.1 IC1.3 Q3.2
N$5: MCP73831.5 R2_BAT.2
N$6: C17.1 J3.24
N$7: C21.1 IC2.5
N$8: C15.1 J3.22
N$10: C13.1 J3.20
N$11: D10.1 R13.1
N$12: C12.1 J3.19
N$13: C11.1 J3.18
N$20: C6.1 J3.5
N$21: C8.1 J3.4
N$26: J4.A5 R16.2
N$27: C19.1 C20.1
N$28: J4.B5 R17.1
PREVGH: C14.1 D1.1 J3.21
PREVGL: C16.1 D2.2 J3.23
RESE: J3.3 Q2.2 R6.2
RESE': R6.1
RESET: C22.1 IC2.1 R2.2 R20.1 SJ1.2 U3.3 U$1.3 U$1.4
RTC_RST: U3.16 U5.4
RX: TP2.TP U3.24
SCK: D6.2 J1.P5 J3.13 R10.1 TP8.TP U2.6 U3.6
SCL: J2.4 R3.1 U1.7 U3.20 U4.4 U5.16
SDA: J2.3 R4.1 U1.8 U3.19 U4.3 U5.15
SRC: C4.2 D1.2 L1.1 Q2.3
SS_SD: D9.2 J1.P2 R7.1 U3.4
TX: TP1.TP U3.25
USB_D+: D12.4 U3.14
USB_D-: D12.6 U3.13
VBAT: C2_BAT.1 MCP73831.3 Q3.3 TP3.TP U1.2 U1.3
VBUS: C1_BAT.1 CHG_LED.A D11.2 D12.2 MCP73831.4 Q3.1 R1_PWRUSB.2 R18.2 TP14.TP
VRTC: C3.1 C5.1 R13.2 U5.14
VUSB: J4.A4 J4.A9 J4.B4 J4.B9 R18.1

## Tracks (layer width: path | path; a pad name or v marks a point on that pad's centre or on a via)
3V3  (via drill 0.3)
  Top 0.127: 85.2,66.22 85.2,65.84 85.46,65.58 R14.2 | 85.2,66.22 85.2,67.36 D10.2 85.08,67.49 82.03,70.54 78.35,70.54 R15.2 78.22,70.66 65.14,83.74 65.14,94.41 R20.2 65.14,94.54 v65.9,94.54 | 85.2,66.22 87.24,66.22 89.27,64.19 89.27,61.39 89.14,61.27 88.38,61.27 87.62,62.03 87.62,62.41 U5.2 | 54.98,104.06 44.82,93.9 44.69,93.9 44.44,93.65 IC2.2 44.31,93.52 44.06,93.52 v31.1,80.57 | 54.98,104.06 54.98,106.1 R19.2 | 54.98,104.06 v65.9,104.06 75.93,104.06 TP16.TP | 34.79,68.25 34.79,67.62 32.88,65.71 32.88,65.46 U2.3 | 34.79,68.25 34.91,68.38 40.12,68.38 40.5,68 U2.8 40.63,67.87 40.63,66.73 U2.7 | R21.2 19.67,108.76 14.47,103.56 14.47,100 C9.1 14.34,99.87 13.96,99.49 v13.96,99.11 | v6.08,91.24 5.7,90.86 4.94,90.86 J1.P4 | v31.1,71.93 34.79,68.25 | 118.99,34.09 118.99,39.93 IC1.5 | 118.99,34.09 120.26,32.82 127.5,32.82 133.97,39.29 133.97,40.18 133.85,40.31 | 133.85,40.31 129.27,40.31 126.99,38.02 C18.+ | v133.21,48.31 133.21,54.66 131.43,56.44 131.18,56.44 C1_BAT2.1 | 133.85,40.31 v134.23,40.69 | v148.45,37.14 148.45,35.61 165.21,18.85 165.47,18.85 J2.2 | R11.2 56.38,45.39 56.38,44.76 54.85,43.23 48.63,43.23 R10.2 48.5,43.1 44.69,43.1 R12.2 44.56,43.1 43.93,42.47 43.93,40.82 51.42,33.33 51.42,31.8 | v84.06,26.85 84.06,25.58 Q1.3 | v87.74,30.53 87.74,32.69 R_CL1.2 | 37.71,34.85 37.71,32.31 37.96,32.06 37.96,28.12 R7.2 | 37.71,34.85 37.96,35.1 38.98,35.1 41.01,33.07 41.01,28.75 41.14,28.63 | 41.14,28.63 42.15,27.61 R9.2 42.28,27.48 46.47,27.48 R8.2 46.6,27.61 47.23,27.61 51.42,31.8 | 37.71,34.85 25.51,47.04 22.72,47.04 R1.2 | 41.14,28.63 38.6,26.09 21.83,26.09 9,38.91 9,55.42 U3.2 v9,57.07
  Top 0.127: 51.42,31.8 73.14,31.8 77.58,36.25 84.06,36.25 87.49,32.82 87.74,32.82 R_CL1.2 | v96.63,34.09 118.99,34.09 | v89.14,34.09 87.87,32.82 R_CL1.2
  Bottom 0.127: v13.96,99.11 v6.08,91.24 6.08,90.98 20.94,76.12 | 20.94,76.12 25.13,71.93 v31.1,71.93 v31.1,80.57 | v65.9,104.06 v65.9,94.54 | v133.21,48.31 133.21,46.53 134.23,45.52 v134.23,40.69 137.78,37.14 v148.45,37.14 | v87.74,30.53 v84.06,26.85 | v89.14,34.09 v96.63,34.09 | 20.94,76.12 11.93,67.11 11.93,60 v9,57.07
12C_PW  (via drill 0.3)
  Top 0.127: R3.2 151.75,7.93 152.64,7.93 153.66,8.94 R4.2 | U4.8 154.67,16.05 154.67,14.78 157.85,11.61 157.85,8.94 157.21,8.31 C1.1 157.09,8.18 156.96,8.05 155.56,8.05 C2.1 155.44,8.05 154.55,8.94 153.78,8.94 R4.2 | 153.28,15.42 153.15,15.55 153.15,16.05 U4.6 | 153.28,15.42 153.78,14.91 153.78,13.26 U4.2 153.78,13.13 153.78,9.07 R4.2 | v23.48,70.16 21.7,71.93 21.7,72.95 U3.17 | v108.19,32.18 135.12,32.18 151.88,15.42 153.28,15.42
  Bottom 0.127: v23.48,70.16 31.1,70.16 34.28,66.98 73.39,66.98 v108.19,32.18
32KHZ
  Top 0.127: 86.86,64.82 86.86,65.46 R14.1 | 86.86,64.82 88.76,62.92 U5.1 | 86.86,64.82 85.08,64.82 82.16,67.74 78.85,67.74 69.96,76.63 35.17,76.63 17.89,59.36 U3.9
DN
  Top 0.127: 163.18,51.74 163.31,51.61 163.94,51.61 J4.B7 | 163.18,51.74 163.18,52.25 163.44,52.5 163.94,52.5 J4.A7 | 163.18,51.74 160.39,48.95 154.29,48.95 D12.1
DP
  Top 0.127: J4.A6 164.07,52.12 164.58,52.12 164.83,52.38 164.83,52.76 164.58,53.01 164.07,53.01 J4.B6 163.94,53.01 163.44,53.01 161.28,50.85 154.29,50.85 D12.3
EPD_3V3  (via drill 0.3)
  Top 0.127: 71.36,34.6 70.35,35.61 70.35,46.15 TP17.TP | 86.47,15.04 86.6,15.04 J3.15 | 86.47,15.04 86.22,15.04 J3.16 | v86.22,24.69 82.03,24.69 Q1.2 | 88.51,26.98 89.01,27.48 C7.1 | 88.51,26.98 93.46,22.02 93.46,21.01 93.33,20.88 90.54,20.88 90.03,20.37 89.65,20.37 C10.1 | 88.51,26.98 v88.38,26.85 | v86.47,16.31 86.47,15.04 | v75.17,34.6 71.36,34.6 | 71.36,34.6 L1.2
  Bottom 0.127: v88.38,26.85 v86.22,24.69 | v86.47,16.31 86.47,24.44 v86.22,24.69 | v75.17,34.6 85.08,24.69 v86.22,24.69
EPD_3V3_C  (via drill 0.3)
  Top 0.127: v82.03,28.37 82.03,26.59 Q1.1 | v85.71,32.06 86.35,32.69 R_CL1.1 86.35,32.82 86.35,33.33 v85.71,33.96 | v23.74,84 20.43,80.7 20.43,73.08 U3.18 | TP13.TP 88.25,104.32 v77.97,94.03 85.71,86.28 85.71,67.74 86.73,66.73 87.11,66.73 89.52,64.31 89.52,60.38 85.71,56.57 v85.71,51.87
  Bottom 0.127: v85.71,32.06 v82.03,28.37 | v23.74,84 31.74,84 41.77,94.03 v77.97,94.03 | v85.71,51.87 v85.71,33.96
EPD_BUSY  (via drill 0.3)
  Top 0.127: v89.65,16.43 89.65,15.04 J3.9 | v48.12,70.79 v52.44,66.47 | v33.64,85.27 29.45,85.27 TP9.TP | v19.55,83.49 14.21,83.49 9.39,78.66 9.39,77.78 10.15,77.01 10.15,73.08 U3.26
  Bottom 0.127: v89.65,16.43 89.65,29.26 v52.44,66.47 | v48.12,70.79 v33.64,85.27 31.86,83.49 v19.55,83.49
EPD_CS  (via drill 0.3)
  Top 0.127: v87.74,14.15 88.13,14.53 88.13,14.91 J3.12 | v47.23,28.25 46.6,28.88 R8.1 46.47,29.01 43.93,29.01 41.52,31.42 41.52,33.07 41.64,33.2 42.79,33.2 43.55,33.96 46.22,33.96 D8.2 | v41.26,34.21 20.43,55.04 20.43,55.42 U3.11 | v143.37,50.34 143.88,50.85 143.88,63.01 TP10.TP
  Bottom 0.127: v41.26,34.21 v47.23,28.25 61.33,14.15 v87.74,14.15 87.87,14.28 90.92,14.28 126.99,50.34 v143.37,50.34
EPD_DC  (via drill 0.3)
  Top 0.127: v88.25,13.77 88.63,14.15 88.63,14.91 J3.11 | v16.88,13.64 TP11.TP | v12.81,36.12 12.81,55.42 U3.5
  Bottom 0.127: v88.25,13.77 88,13.77 87.87,13.64 v16.88,13.64 12.81,17.7 v12.81,36.12
EPD_RST  (via drill 0.3)
  Top 0.127: v85.97,17.96 86.6,17.96 89.14,15.42 89.14,15.04 J3.10 | v17.51,71.93 16.5,72.95 U3.21 16.62,73.08 16.62,73.33 18.15,74.85 18.15,75.62 TP12.TP
  Bottom 0.127: v85.97,17.96 85.97,21.01 40.25,66.73 22.72,66.73 v17.51,71.93
FLASH_CS
  Top 0.127: R9.1 42.15,28.88 42.15,30.4 41.26,31.29 41.26,33.2 41.9,33.83 42.15,33.83 D7.2 42.15,33.96 42.15,34.85 21.58,55.42 U3.12 21.7,56.57 32.75,67.62 32.75,67.87 U2.1
GDR
  Top 0.127: R5.2 96.13,26.09 94.48,24.44 94.48,20.37 93.33,19.23 93.33,15.04 J3.2 93.21,14.91 93.21,14.66 90.79,12.24 82.79,12.24 79.49,15.55 75.04,15.55 72.38,18.21 72.38,18.85 Q2.1
GND  (via drill 0.3)
  Top 0.127: U3.29_5 13.58,62.79 14.59,62.79 U3.29_8 | U3.29_9 14.59,64.06 13.58,64.06 U3.29_6 13.45,63.93 13.45,62.92 U3.29_5 | U3.29_7 14.59,61.65 13.58,61.65 U3.29_4 13.45,61.65 12.31,61.65 | 12.31,62.79 12.31,61.65 | 12.31,61.65 U3.29_1 12.18,61.52 v11.42,61.52 | 12.31,62.79 U3.29_5 | 12.31,62.79 U3.29_2 12.31,62.92 12.31,63.93 U3.29_3 12.18,64.06 7.73,68.5 7.73,72.95 U3.28 7.73,73.08 7.73,78.03 15.35,85.65 J1.G1 15.35,85.78 15.35,86.92 14.59,87.68 14.59,90.6 | 14.59,90.6 15.35,91.36 J1.G2 15.48,91.49 16.37,92.38 16.37,95.3 15.74,95.94 15.74,99.87 C9.2 15.74,100 v16.37,100.64 | 4.81,93.14 4.43,93.52 4.31,93.52 2.27,95.56 2.27,95.81 J1.G4 | 4.81,93.14 1.26,89.59 1.26,82.86 J1.G3 | 4.81,93.14 J1.P6 4.94,93.02 5.45,93.02 7.86,90.6 14.59,90.6 | U$3.1 22.47,108.51 25.9,108.51 U$3.2 26.02,108.38 26.02,108 v26.4,107.62 | 28.31,107.37 28.31,97.08 28.94,96.44 TP4.TP | 28.31,107.37 28.31,107.49 C23.2 | 28.31,107.37 v27.42,107.37 | 28.31,107.37 C23.2 | TP5.TP 75.04,108.89 69.46,108.89 C22.2 69.33,108.76 66.41,108.76 66.28,108.64 U$1.2 66.15,108.51 62.73,108.51 U$1.1 62.6,108.64 62.09,109.14 59.17,109.14 C24.2 59.04,109.14 57.65,109.14 55.74,107.24 55.74,107.11 55.49,106.86 52.82,106.86 51.3,108.38 U$2.2 51.17,108.51 47.74,108.51 U$2.1 47.61,108.38 47.1,107.87 44.44,107.87 | 44.44,107.87 43.55,107.87 C21.2 43.42,107.75 43.29,107.62 28.31,107.62 C23.2 | 44.44,107.87 44.44,94.54 IC2.3 | v123.3,41.07 121.78,41.07 IC1.2 | v125.46,41.07 126.86,41.07 C18.- 126.99,41.07 128.89,41.07 | 128.89,41.07 133.21,41.07 R1_PWRUSB.1 | 122.8,46.03 122.8,45.52 C1_BAT.2 | 122.8,46.03 125.08,48.31 128,48.31 MCP73831.2 128.13,48.31 128.38,48.31 128.89,47.8 128.89,46.66
  Top 0.127: 114.67,45.64 115.05,46.03 115.43,46.03 116.07,46.66 C2_BAT.2 116.19,46.66 116.83,46.03 122.8,46.03 | 114.67,45.64 113.14,44.12 108.83,44.12 R2_BAT.1 | 115.43,50.98 115.3,51.11 114.29,51.11 113.4,50.22 109.59,50.22 C1_BAT1.2 109.46,50.22 108.83,50.85 98.41,50.85 96,48.44 C5.2 95.87,48.31 91.68,44.12 | 115.43,50.98 115.43,48.44 114.29,47.3 114.29,46.03 114.67,45.64 | 115.43,50.98 119.49,55.04 131.05,55.04 C1_BAT2.2 | 128.89,46.66 128.89,41.07 | C1.2 157.09,9.58 156.83,9.32 155.56,9.32 C2.2 155.44,9.32 155.44,12.37 154.67,13.13 U4.1 154.55,13.26 154.55,14.53 153.91,15.16 153.91,16.05 U4.7 | 152.77,16.94 152.26,16.43 152.26,16.18 U4.5 | 152.77,16.94 153.28,16.94 153.78,16.43 | 153.78,16.43 153.78,16.18 U4.7 | 153.78,16.43 155.05,17.7 165.47,17.7 J2.1 | 153.78,16.43 U4.7 | J4.B12 163.94,49.2 163.94,48.95 J4.A1 164.07,48.82 164.07,47.55 164.45,47.17 J4.MP3 164.58,47.17 168.39,47.17 J4.MP1 168.52,47.17 168.52,57.33 J4.MP2 168.39,57.46 164.58,57.46 J4.MP4 164.45,57.33 164.07,56.95 164.07,55.68 J4.A12 163.94,55.55 163.94,55.42 J4.B1 163.94,55.3 157.59,55.3 156.58,54.28 R17.2 156.45,54.15 156.2,54.15 152.01,49.96 151.75,49.96 D12.5 151.63,49.84 150.99,49.84 150.23,49.07 150.23,45.77 150.61,45.39 R16.1 150.61,45.26 148.7,43.36 148.7,40.56 C19.2 148.58,40.44 147.94,39.8 | 138.8,50.98 138.93,51.11 U1.9 | 138.8,50.98 138.29,50.47 137.91,50.47 U1.4 137.78,50.34 134.1,46.66 128.89,46.66 | U1.1 137.91,51.87 138.16,51.87 138.8,51.23 U1.9 | 138.8,50.98 139.81,50.98 U1.6 139.94,50.85 140.2,50.85 145.66,45.39 C20.2 145.78,45.26 145.78,40.95 146.93,39.8 147.94,39.8
  Top 0.127: 138.8,50.98 U1.9 | 152.77,16.94 152.77,30.91 147.94,35.74 147.94,39.8 | 34.91,64.19 32.88,64.19 U2.4 32.75,64.06 v32.12,63.42 | 34.91,64.19 36.69,65.96 U2.9 | v38.6,31.93 38.6,32.82 D9.1 | v42.02,31.55 42.02,32.18 42.15,32.31 D7.1 42.28,32.44 46.22,32.44 D8.1 46.34,32.56 46.34,32.82 46.98,33.45 46.98,37.39 43.68,40.69 43.68,54.03 44.44,54.79 | 44.44,54.79 43.68,55.55 D6.1 43.55,55.68 41.9,55.68 34.91,62.66 34.91,64.19 | 44.44,54.79 50.41,54.79 51.17,55.55 D5.1 51.3,55.68 51.93,56.31 53.2,56.31 53.84,55.68 58.79,55.68 D4.1 58.92,55.68 59.17,55.68 59.8,56.31 82.16,56.31 84.95,53.52 84.95,53.26 U5.13 85.08,53.14 85.08,49.45 C3.2 85.2,49.33 85.46,49.33 90.67,44.12 91.68,44.12 | C12.2 87.24,21.39 86.35,21.39 C13.2 86.22,21.39 85.33,21.39 C14.2 85.2,21.26 84.32,21.26 C15.2 84.19,21.26 83.3,21.26 C16.2 83.17,21.26 82.28,21.26 C17.2 82.16,21.26 82.16,23.17 81.27,24.05 81.27,30.4 82.54,31.67 83.68,31.67 87.87,27.48 87.87,24.05 89.52,22.4 89.52,21.64 C10.2 | C10.2 89.65,21.64 91.05,21.64 C6.2 91.17,21.51 92.7,21.51 C8.2 | 87.11,13.26 85.84,14.53 85.84,14.91 J3.17 | 87.11,13.26 88.89,13.26 90.16,14.53 90.16,14.91 J3.8 90.16,15.04 90.16,16.56 88.89,17.83 88.89,20.88 89.52,21.51 C10.2 | R2.1 75.55,10.85 75.55,12.5 75.68,12.62 SJ1.1 | SJ1.1 75.81,12.62 81.14,12.62 J3.MP2 81.27,12.5 81.78,11.99 87.11,11.99 | 87.11,11.99 90.92,11.99 91.43,12.5 94.6,12.5 J3.MP1 94.73,12.62 94.73,23.55 96.76,25.58 96.76,26.72 95.36,28.12 | C11.2 75.68,14.53 75.68,12.75 SJ1.1 | 94.09,26.85 94.73,26.21 R5.1 | 94.09,26.85 93.59,27.36 90.54,27.36 C7.2 | 91.68,44.12 91.68,37.01
  Top 0.127: 91.68,37.01 91.68,36.37 D3.1 | 95.36,28.12 96.13,28.88 96.13,36.63 95.75,37.01 91.68,37.01 | 95.36,28.12 94.09,26.85 | v87.11,12.75 87.11,13.26 | 87.11,11.99 v87.11,11.74 | U3.1 7.73,56.93 v7.88,57.07
  Bottom 0.127: 7.73,57.07 7.73,57.84 v11.42,61.52 | v27.42,107.37 27.17,107.62 v26.4,107.62 19.42,100.64 v16.37,100.64 | v125.46,41.07 v123.3,41.07 | v38.6,31.93 41.64,31.93 v42.02,31.55 | v87.11,11.74 v87.11,12.75 | 7.73,57.07 8.37,57.07 8.88,56.57 23.1,56.57 29.96,63.42 v32.12,63.42 | 7.73,57.07 v7.88,57.07
GPIO8
  Top 0.127: R1.1 22.59,48.44 22.59,51.87 19.04,55.42 U3.10
INT_RTC  (via drill 0.3)
  Top 0.127: v79.87,69.27 78.35,69.27 R15.1 78.22,69.39 70.73,76.89 64.25,76.89 | v85.2,63.93 86.22,62.92 86.22,62.54 U5.3 | 64.25,76.89 35.04,76.89 16.62,58.47 U3.8 | 64.25,76.89 64.25,94.92 64.5,95.17 69.2,95.17 78.09,104.06 81.39,104.06 TP15.TP
  Bottom 0.127: v85.2,63.93 v79.87,69.27
IO/BOOT
  Top 0.127: R19.1 54.98,107.62 53.71,107.62 51.3,110.03 U$2.3 51.17,110.03 47.74,110.03 U$2.4 47.61,109.91 46.6,108.89 28.31,108.89 C23.1 28.18,108.76 24.24,104.83 24.24,73.08 U3.15
IO/CHANGE  (via drill 0.3)
  Top 0.127: v57.14,108 59.04,108 C24.1 | v27.04,109.02 26.02,110.03 U$3.3 25.9,110.03 22.47,110.03 U$3.4 22.34,110.03 20.43,110.03 | 20.43,110.03 19.8,110.03 R21.1 | 20.43,110.03 20.43,83.74 14.08,77.39 14.08,73.08 U3.23
  Bottom 0.127: v57.14,108 28.05,108 v27.04,109.02
MISO  (via drill 0.3)
  Top 0.127: 60.19,53.14 60.19,55.55 D4.2 | 60.19,53.14 60.19,48.06 54.72,42.6 48.12,42.6 47.36,41.83 44.69,41.83 R12.1 | 6.08,98.6 6.08,105.33 5.83,105.59 TP6.TP | 6.08,98.6 6.08,94.79 5.45,94.16 5.19,94.16 J1.P7 | v31.99,66.22 32.37,66.6 32.75,66.6 U2.2 | v15.61,66.22 8.88,72.95 U3.27 9,73.08 9,78.66 14.08,83.74 15.35,83.74 16.88,85.27 16.88,100.76 16.5,101.14 15.74,101.14 15.1,100.51 15.1,99.62 14.08,98.6 6.08,98.6 | v53.2,53.14 60.19,53.14
  Bottom 0.127: v15.61,66.22 v31.99,66.22 39.74,66.22 52.82,53.14 v53.2,53.14
MOSI  (via drill 0.3)
  Top 0.127: TP7.TP 51.04,74.47 40.75,64.19 40.63,64.19 U2.5 40.63,64.06 v40.63,58.34 | v87.11,15.8 87.11,15.04 J3.14 | v55.74,44.76 55.11,45.39 R11.1 54.98,45.52 52.69,47.8 52.69,55.55 D5.2 | v21.83,48.69 15.35,55.17 15.35,55.42 U3.7 | v6.21,89.46 5.96,89.71 5.19,89.71 J1.P3
  Bottom 0.127: v87.11,15.8 84.7,15.8 v55.74,44.76 51.8,48.69 41.52,48.69 | 41.52,48.69 v21.83,48.69 15.48,48.69 7.26,56.92 7.26,72.92 6.21,73.97 v6.21,89.46 | v40.63,58.34 41.52,57.46 41.52,48.69
N$1
  Top 0.127: C4.1 78.85,34.85 79.24,34.47 79.24,34.34 81.39,32.18 84.57,32.18 87.74,29.01 95.75,29.01 95.87,29.13 95.87,32.82 95.36,33.33 D2.1 95.24,33.45 95.11,33.58 95.11,36.25 D3.2
N$2
  Top 0.127: R1_BAT.2 121.78,33.83 121.78,38.53 128,44.76 128,47.42 MCP73831.1
N$3
  Top 0.127: CHG_LED.C 114.67,43.23 116.45,43.23 119.11,40.56 119.37,40.56 120.38,39.55 120.38,33.83 R1_BAT.1
N$4  (via drill 0.3)
  Top 0.127: 109.21,49.45 108.57,50.09 108.32,50.09 C1_BAT1.1 | 109.21,49.45 113.91,49.45 114.8,50.34 D11.1 | 121.02,41.45 121.02,40.56 121.15,40.44 121.27,40.44 121.65,40.06 IC1.1 | 121.02,41.45 121.4,41.83 121.65,41.83 IC1.3 121.78,41.96 v122.42,42.6 | v133.46,45.26 134.48,45.26 Q3.2 | 109.21,49.45 109.21,45.77 108.06,44.63 108.06,42.34 109.21,41.2 115.18,41.2 115.3,41.33 115.3,42.34 114.92,42.72 114.16,42.72 114.03,42.85 114.03,43.87 114.16,43.99 118.48,43.99 121.02,41.45
  Bottom 0.127: v133.46,45.26 125.08,45.26 v122.42,42.6
N$5
  Top 0.127: R2_BAT.2 108.83,42.85 112.26,42.85 114.29,44.88 123.3,44.88 125.34,46.91 125.34,47.42 MCP73831.5
N$6
  Top 0.127: J3.24 82.28,15.04 82.28,19.86 C17.1
N$7
  Top 0.127: IC2.5 41.64,92.63 41.64,93.52 43.42,95.3 43.42,106.48 C21.1
N$8
  Top 0.127: J3.22 83.3,15.04 83.3,18.85 84.32,19.86 C15.1
N$10
  Top 0.127: J3.20 84.32,15.04 84.32,17.96 86.35,19.99 C13.1
N$11
  Top 0.127: R13.1 95.36,65.96 88.63,65.96 87.24,67.36 D10.1
N$12
  Top 0.127: J3.19 84.82,15.04 84.82,17.45 87.24,19.86 87.24,20.12 C12.1
N$13
  Top 0.127: J3.18 85.2,14.91 85.2,14.66 84.95,14.4 81.01,14.4 77.58,17.83 73.14,17.83 72.76,18.21 72.76,19.48 72.63,19.61 72,19.61 71.87,19.48 71.87,18.21 74.79,15.29 76.31,15.29 76.95,14.66 C11.1
N$20
  Top 0.127: J3.5 91.68,15.04 91.68,19.74 91.17,20.24 C6.1
N$21
  Top 0.127: J3.4 92.32,15.04 92.32,19.74 92.7,20.12 C8.1
N$26
  Top 0.127: R16.2 152.01,45.39 157.72,45.39 163.31,50.98 163.94,50.98 J4.A5
N$27
  Top 0.127: C20.1 145.78,46.53 147.31,45.01 147.31,40.56 C19.1
N$28
  Top 0.127: R17.1 156.58,53.01 162.42,53.01 163.31,53.9 163.94,53.9 J4.B5
PREVGH
  Top 0.127: J3.21 83.81,15.04 83.81,18.34 85.2,19.74 85.2,19.99 C14.1 85.2,20.12 85.84,20.75 87.74,20.75 88,21.01 88,23.55 83.17,28.37 83.17,30.91 D1.1
PREVGL
  Top 0.127: J3.23 82.79,15.04 82.79,19.36 83.3,19.86 C16.1 83.3,19.99 82.79,20.5 81.65,20.5 79.24,18.09 73.27,18.09 73.14,18.21 73.14,19.48 80.38,26.72 80.38,31.55 78.22,33.71 78.22,35.48 78.47,35.74 79.24,35.74 79.49,35.48 79.49,34.47 79.74,34.21 82.92,34.21 87.24,29.9 95.24,29.9 D2.2
RESE
  Top 0.127: J3.3 92.82,15.04 92.82,19.1 93.71,19.99 93.71,23.04 89.78,26.98 89.78,27.86 88.89,28.75 86.98,28.75 83.81,31.93 82.41,31.93 80.63,30.15 80.63,21.26 78.73,19.36 R6.2 78.6,19.23 77.97,18.59 76.95,18.59 76.7,18.85 73.65,18.85 Q2.2
RESET  (via drill 0.3)
  Top 0.127: U$1.4 62.73,110.03 66.15,110.03 U$1.3 66.28,110.03 69.33,110.03 C22.1 69.46,110.16 75.68,110.16 77.2,108.64 77.2,103.56 69.58,95.94 65.14,95.94 R20.1 65.01,95.81 64.76,95.81 61.58,92.63 44.44,92.63 IC2.1 44.31,92.51 44.31,90.35 23.61,69.65 23.48,69.65 v19.55,65.71 | R2.2 74.41,10.85 74.41,12.5 74.28,12.62 SJ1.2 74.16,12.75 34.79,12.75 6.97,40.56 6.97,56.95 7.61,57.58 9.13,57.58 10.27,56.44 | 10.27,56.44 U3.3 | v10.91,57.07 10.27,56.44
  Bottom 0.127: v19.55,65.71 v10.91,57.07
RTC_RST  (via drill 0.3)
  Top 0.127: v24.5,71.17 22.97,72.7 22.97,72.95 U3.16 | v74.16,67.49 80.38,67.49 84.95,62.92 84.95,62.54 U5.4
  Bottom 0.127: v24.5,71.17 30.85,71.17 34.53,67.49 v74.16,67.49
RX
  Top 0.127: U3.24 12.81,73.08 12.81,77.9 13.07,78.16 TP2.TP
SCK  (via drill 0.3)
  Top 0.127: 13.96,58.34 13.96,55.55 U3.6 | J1.P5 5.19,91.87 6.08,91.87 6.97,90.98 v6.97,90.73 7.09,90.61 7.09,65.21 13.96,58.34 | v24.75,90.73 29.07,90.73 TP8.TP | v40.63,64.69 40.63,65.33 U2.6 | v44.31,56.31 44.95,55.68 D6.2 | v85.33,16.82 86.73,16.82 87.62,15.93 87.62,15.04 J3.13 | v60.31,41.83 48.63,41.83 R10.1 | v16.12,58.34 13.96,58.34
  Bottom 0.127: v6.97,90.73 v24.75,90.73 | 40.63,63.93 40.63,60 v44.31,56.31 45.83,56.31 v60.31,41.83 v85.33,16.82 | 40.63,63.93 v40.63,64.69 | v16.12,58.34 24.5,58.34 30.09,63.93 40.63,63.93
SCL  (via drill 0.3)
  Top 0.127: R3.1 151.75,9.2 151.75,12.75 152.13,13.13 U4.4 152.26,13.26 152.26,13.51 v153.28,14.53 | U1.7 139.94,51.36 v140.7,51.36 141.34,51.36 143.12,49.58 144.77,49.58 153.91,58.73 169.53,58.73 169.66,58.6 169.66,24.94 165.6,20.88 J2.4 165.47,20.75 164.96,20.75 v164.45,20.24 | v18.91,71.68 17.89,72.7 17.89,72.95 U3.20 | v87.62,54.66 88.76,53.52 88.76,53.26 U5.16
  Bottom 0.127: v153.28,14.53 158.74,14.53 v164.45,20.24 | v18.91,71.68 30.72,71.68 34.4,68 74.28,68 v87.62,54.66 137.78,54.66 140.7,51.74 v140.7,51.36
SDA  (via drill 0.3)
  Top 0.127: U4.3 153.02,13.13 153.02,9.45 152.13,8.56 151.12,8.56 150.86,8.31 150.86,7.54 151.12,7.29 152.13,7.29 152.51,7.67 153.66,7.67 R4.1 153.78,7.67 154.67,7.67 154.93,7.42 157.47,7.42 166.36,16.31 166.36,19.36 165.85,19.86 | 165.85,19.86 166.36,20.37 166.36,21.26 169.91,24.82 169.91,58.73 169.66,58.98 153.78,58.98 144.64,49.84 143.24,49.84 141.21,51.87 139.94,51.87 U1.8 139.81,51.99 v137.78,54.03 | 165.85,19.86 165.6,19.86 J2.3 165.85,19.86 | v21.2,70.66 19.16,72.7 19.16,72.95 U3.19 | v86.35,54.66 87.49,53.52 87.49,53.26 U5.15
  Bottom 0.127: v21.2,70.66 30.98,70.66 34.4,67.23 73.77,67.23 v86.35,54.66 86.98,54.03 v137.78,54.03
SRC
  Top 0.127: 77.97,32.56 77.97,35.61 78.35,35.99 79.36,35.99 80.12,35.23 80.12,34.98 C4.2 | 77.97,32.56 79.49,31.04 D1.2 | 72.89,28.5 72.89,21.01 Q2.3 | 72.89,28.5 71.36,30.02 L1.1 | 77.97,32.56 76.95,32.56 72.89,28.5
SS_SD
  Top 0.127: D9.2 38.6,34.34 39.23,33.71 39.23,27.99 38.09,26.85 R7.1 37.96,26.85 21.45,26.85 11.54,36.75 11.54,55.42 U3.4 11.42,55.55 11.42,60.5 6.84,65.08 6.84,87.31 5.58,88.57 J1.P2
TX
  Top 0.127: U3.25 11.42,73.08 11.42,77.52 10.78,78.16 TP1.TP
USB_D+  (via drill 0.3)
  Top 0.127: v146.67,50.85 151.63,50.85 D12.4 | v41.01,57.2 v85.71,57.2 | v25.9,57.2 U3.14
  Bottom 0.127: v146.67,50.85 141.97,50.85 135.62,57.2 v85.71,57.2 | v25.9,57.2 v41.01,57.2
USB_D-  (via drill 0.3)
  Top 0.127: v150.74,48.95 151.63,48.95 D12.6 | v40.5,57.71 v85.2,57.71 | v24.88,57.71 22.97,55.8 U3.13
  Bottom 0.127: v150.74,48.95 149.21,48.95 140.45,57.71 v85.2,57.71 | v24.88,57.71 v40.5,57.71
VBAT
  Top 0.127: C2_BAT.1 114.92,46.79 116.95,48.82 127.24,48.82 127.75,49.33 128,49.33 MCP73831.3 128.13,49.33 131.56,49.33 133.46,47.42 Q3.3 133.59,47.42 134.1,47.42 137.53,50.85 137.78,50.85 U1.3 137.91,50.98 137.91,51.36 U1.2 137.78,51.49 137.4,51.49 137.27,51.61 137.27,54.79 142.67,60.18 142.67,64.48 TP3.TP
VBUS  (via drill 0.3)
  Top 0.127: D11.2 116.95,50.34 124.45,50.34 125.34,49.45 MCP73831.4 125.46,49.45 126.61,49.45 128.26,51.11 | 128.26,51.11 131.81,54.66 131.81,55.68 131.69,55.8 130.67,55.8 123.56,62.92 116.95,62.92 TP14.TP | 151.37,38.02 151.37,47.3 153.91,49.84 154.17,49.84 D12.2 | 151.37,38.02 152.9,36.5 R18.2 | CHG_LED.A 114.54,41.96 113.78,42.72 113.78,43.99 114.03,44.25 122.67,44.25 C1_BAT.1 122.8,44.12 123.81,43.1 123.81,40.95 121.15,38.28 121.15,33.2 121.27,33.07 124.45,33.07 131.05,39.68 v132.45,39.68 133.21,39.68 R1_PWRUSB.2 | v132.58,41.71 132.58,45.26 Q3.1 | v149.97,38.02 151.37,38.02 | v129.53,49.84 128.26,51.11
  Bottom 0.127: 132.58,39.8 v132.58,41.71 133.97,43.1 133.97,45.39 v129.53,49.84 | v149.97,38.02 148.58,36.63 135.75,36.63 132.58,39.8 | 132.58,39.8 v132.45,39.68
VRTC
  Top 0.127: 86.35,51.36 86.35,53.14 U5.14 | 86.35,51.36 86.35,49.45 C3.1 | 95.49,51.36 95.49,50.98 95.87,50.6 C5.1 | 95.49,51.36 95.49,64.57 R13.2 | 95.49,51.36 86.35,51.36
VUSB
  Top 0.127: J4.A9 163.94,54.79 163.94,54.53 J4.B4 164.07,54.41 164.58,54.41 165.09,53.9 165.09,50.6 164.58,50.09 164.07,50.09 J4.B9 163.94,49.96 163.94,49.84 J4.A4 163.94,49.71 163.44,49.71 157.47,43.74 157.47,36.5 R18.1